# Altium PCB AT89S52继电器工控板.PCBDOC (part 1 of 2)
Units mm, origin at the board's own origin, x right, y up, seen from the top; angles counter-clockwise.
Board outline 172.85 x 146.43 mm, 2 copper layers (Top Layer, Bottom Layer); 86 components, 100 nets, 301 pads, 6 vias.
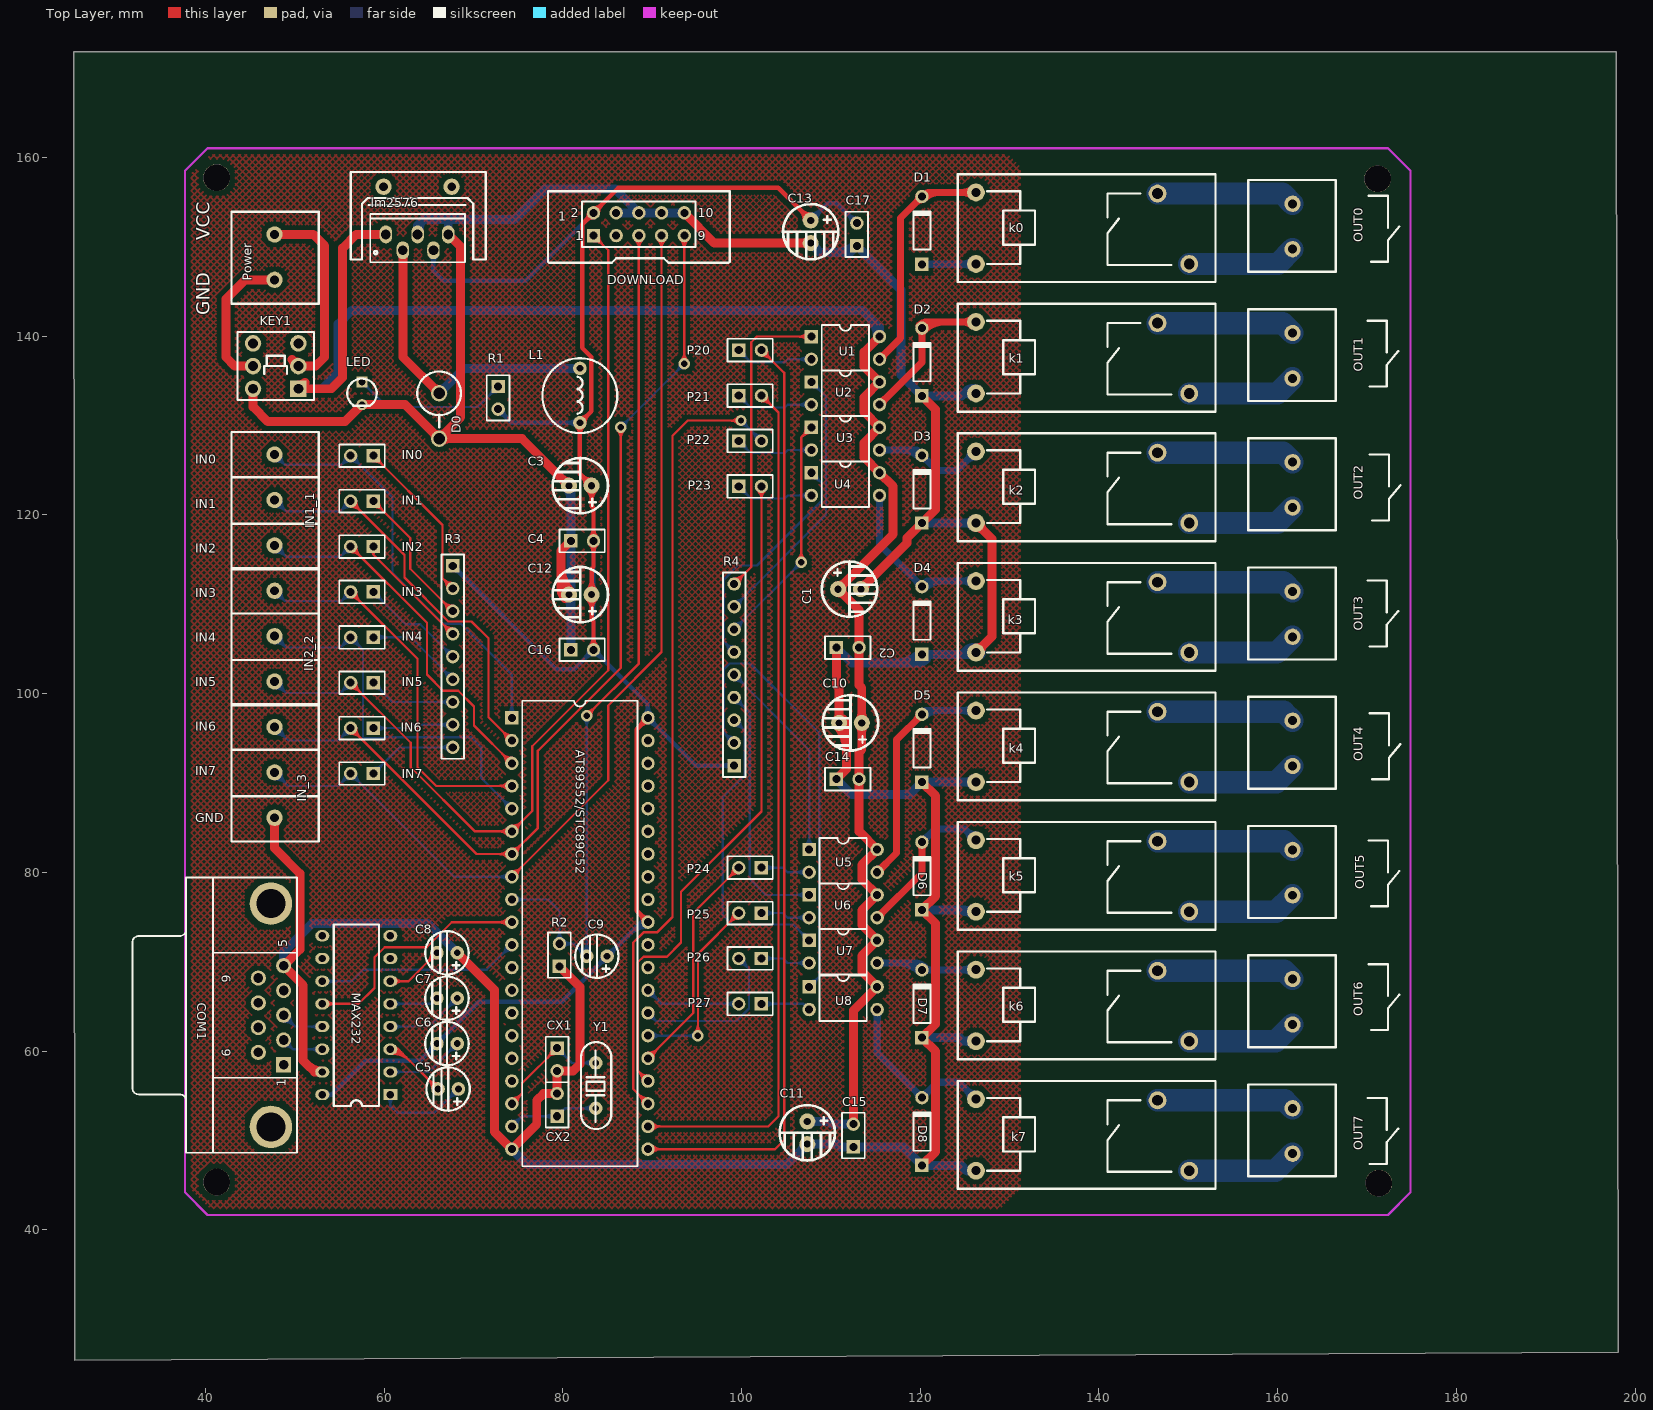
[diagram p0: Top Layer view]
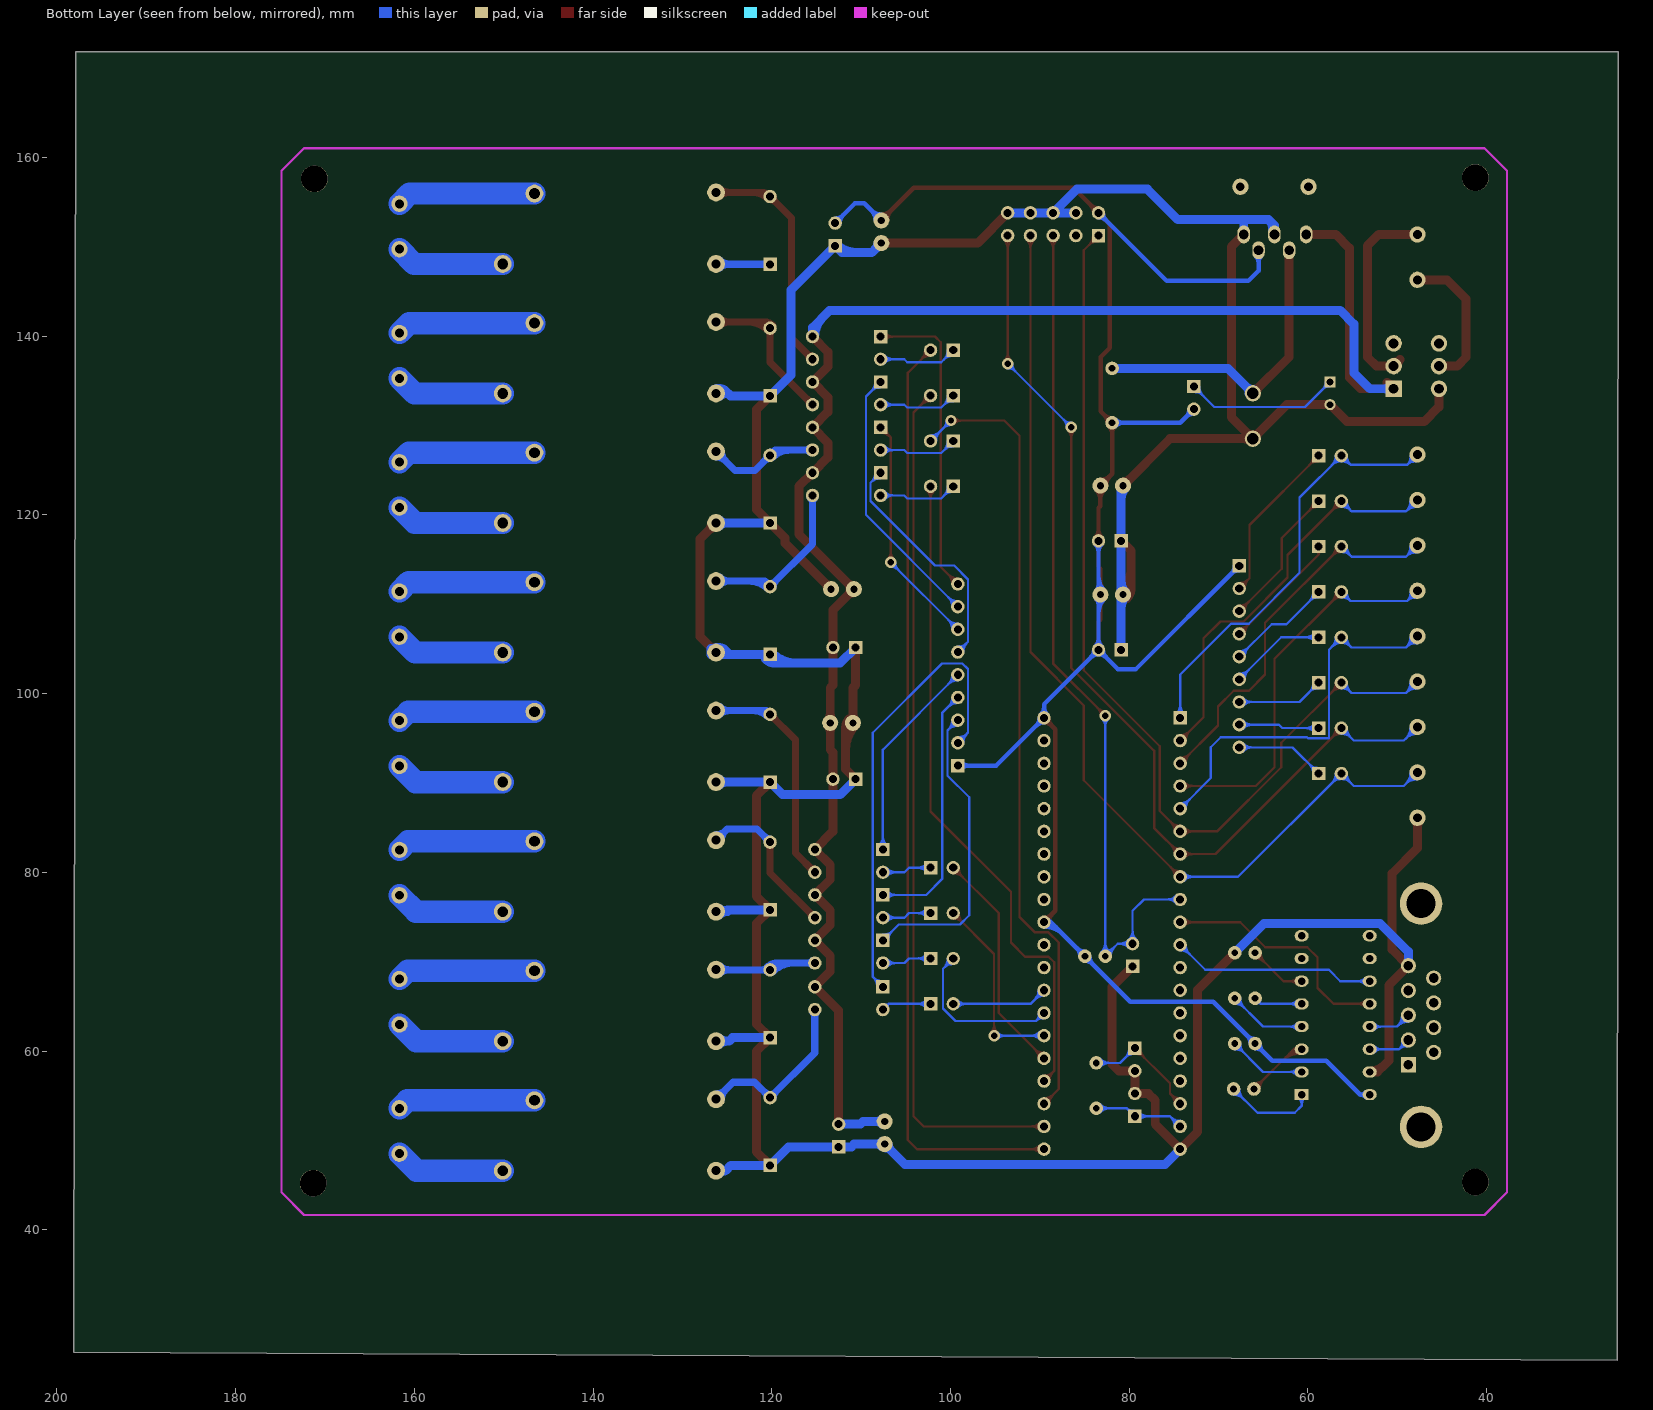
[diagram p1: Bottom Layer view, seen from below]

## Layer stack, top to bottom
Top Layer: signal copper 0.0356
Dielectric: dielectric 0.32, FR-4, Dk 4.8
Bottom Layer: signal copper 0.0356

## Board outline
25.4,25.4 198.12,26.289 197.866,171.831 25.273,171.831

## Design rules (kind name [scope] priority, off if disabled: settings)
Clearance [All] p1: gap=0.5
ComponentClearance [All] p1: gap=0.254 collisioncheckmode=3 verticalgap=0.254
PolygonConnect [All] p1: connectstyle=Relief reliefconductorwidth=0.254 reliefentries=4 polygonreliefangle="90 Angle"
RoutingVias [All] p1: holewidth=0.711 width=1.27 viastyle="Through Hole" minholewidth=0.711 minwidth=1.27 maxholewidth=0.711 maxwidth=1.27
SolderMaskExpansion [All] p1: expansion=0.102
TestPointUsage [All] p1: valid=0 allowmultiple=FALSE
Testpoint [All] p1: side=15 testpointundercomponent=TRUE minsize=1.016 maxsize=2.54 preferedsize=1.524 minholesize=0 maxholesize=1.016 preferedholesize=0.813 testpointgrid=0.025 style=1023 order=0123456789
Width 0.8 [InNetClass('0.8mm')] p1: maxlimit=0.8 minlimit=0.8 preferedwidth=0.8
Width 0.5mm [InNetClass('0.5mm')] p2: maxlimit=0.5 minlimit=0.5 preferedwidth=0.5
Width 1mm [InNetClass('1mm')] p3: maxlimit=1 minlimit=1 preferedwidth=1
Width 2.5mm [InNetClass('2..5mm')] p4: maxlimit=2.5 minlimit=2.5 preferedwidth=2.5
Width [All] p5: maxlimit=0.254 minlimit=0.254 preferedwidth=0.254
17 further rules are at their usual default settings.

## Classes and differential pairs
net class 0.8mm: NetD0_1 NetD1_1 NetD1_2 NetD2_2 NetD3_2 NetD4_2 NetD5_2 NetD6_2 NetD7_2 NetD8_2
net class 0.5mm: +5V
net class 1mm: +12V GND NetD0_1 NetKEY1_1 NetKEY1_6
net class 2..5mm: Netk0_3 Netk0_4 Netk1_3 Netk1_4 Netk2_3 Netk2_4 Netk3_3 Netk3_4 Netk4_3 Netk4_4 Netk5_3 Netk5_4 Netk6_3 Netk6_4 Netk7_3 Netk7_4

## Components (designator, comment, footprint, x,y, rotation, side; value= is the part's Value field where it differs from the comment)
1 "Download" HDR-2x5 88.519,151.384 r0 top
AT89S52/STC89C52 "" DIP-40 81.915,73.152 r270 top
C1 "DJDR" C-DJ-6 113.411,111.76 r0 top
C2 "CPDR" CPDR 111.887,105.156 r0 top
C3 "DJDR" C-DJ-6 80.645,123.19 r180 top
C4 "CPDR" CPDR 82.169,117.094 r0 top
C5 "10uf" C-DJ-4 65.913,58.293 r180 top
C6 "10uf" C-DJ-4 65.786,63.373 r180 top
C7 "10uf" C-DJ-4 65.786,68.453 r180 top
C8 "10uf" C-DJ-4 65.786,73.533 r180 top
C9 "10uf" C-DJ-4 82.55,73.152 r180 top
C10 "DJDR" C-DJ-6 110.871,96.647 r180 top
C11 "DJDR" C-DJ-6 107.442,49.53 r270 top
C12 "DJDR" C-DJ-6 80.645,110.998 r180 top
C13 "DJDR" C-DJ-6 107.823,150.368 r270 top
C14 "CPDR" CPDR 111.887,90.424 r0 top
C15 "CPDR" CPDR 112.522,50.546 r90 top
C16 "CPDR" CPDR 82.169,104.902 r0 top
C17 "CPDR" CPDR 112.903,151.384 r90 top
COM1 "D Connector 9" DSUB1.385-2H9 37.846,64.008 r90 top
CX1 "30p" HDR1X2 79.375,60.325 r270 top
CX2 "30p" HDR1X2 79.375,52.705 r90 top
D0 "WY2JG" ZCDZL 68.707,131.064 r0 top
D1 "ZL2JG" D-ZL-10 120.142,155.575 r90 top
D2 "ZL2JG" D-ZL-10 120.142,140.843 r90 top
D3 "ZL2JG" D-ZL-10 120.142,126.619 r90 top
D4 "ZL2JG" D-ZL-10 120.142,111.923 r90 top
D5 "ZL2JG" D-ZL-10 120.142,97.627 r90 top
D6 "ZL2JG" D-ZL-10 120.142,83.33 r90 top
D7 "ZL2JG" D-ZL-10 120.142,69.034 r90 top
D8 "ZL2JG" D-ZL-10 120.142,54.737 r90 top
IN0 "LED" HDR1X2 58.801,126.619 r180 top
IN1 "LED" HDR1X2 58.801,121.539 r180 top
IN1_1 "PZ_3" JK128_3 49.657,121.793 r0 top
IN2 "LED" HDR1X2 58.801,116.459 r180 top
IN2_2 "PZ_3" JK128_3 49.657,106.553 r0 top
IN3 "LED" HDR1X2 58.801,111.379 r180 top
IN4 "LED" HDR1X2 58.801,106.299 r180 top
IN5 "LED" HDR1X2 58.801,101.219 r180 top
IN6 "LED" HDR1X2 58.801,96.139 r180 top
IN7 "LED" HDR1X2 58.801,91.059 r180 top
IN_3 "" JK128_3 49.657,91.313 r0 top
k0 "JDQ1K" JDQ1KI 129.413,145.542 r0 top
k1 "JDQ1K" JDQ1KI 129.413,131.046 r0 top
k2 "JDQ1K" JDQ1KI 129.413,116.55 r0 top
k3 "JDQ1K" JDQ1KI 129.413,102.054 r0 top
k4 "JDQ1K" JDQ1KI 129.413,87.557 r0 top
k5 "JDQ1K" JDQ1KI 129.413,73.061 r0 top
k6 "JDQ1K" JDQ1KI 129.413,58.565 r0 top
k7 "JDQ1K" JDQ1KI 129.413,44.069 r0 top
KEY1 "SW-DPST" DPDT-6 47.879,136.652 r180 top
L1 "DG" L_DG 83.693,130.302 r270 top
LED "LED" LED_D 59.055,133.096 r270 top
lm2576 "LM2576T5.0" LM2576 63.754,150.876 r0 top
MAX232 "MAX232" DIP16 60.706,55.118 r180 top
OUT0 "PZ_2" DYDZ 160.528,150.241 r180 top
OUT1 "PZ_2" DYDZ 160.528,135.781 r180 top
OUT2 "PZ_2" DYDZ 160.528,121.321 r180 top
OUT3 "PZ_2" DYDZ 160.528,106.861 r180 top
OUT4 "PZ_2" DYDZ 160.528,92.402 r180 top
OUT5 "PZ_2" DYDZ 160.528,77.942 r180 top
OUT6 "PZ_2" DYDZ 160.528,63.482 r180 top
OUT7 "PZ_2" DYDZ 160.528,49.022 r180 top
P20 "" CPDR 100.965,138.43 r0 top
P21 "" CPDR 100.965,133.35 r0 top
P22 "" CPDR 100.965,128.27 r0 top
P23 "" CPDR 100.965,123.19 r0 top
P24 "" CPDR 100.965,80.518 r180 top
P25 "" CPDR 100.965,75.438 r180 top
P26 "" CPDR 100.965,70.358 r180 top
P27 "" CPDR 100.965,65.278 r180 top
Power "PZ_2" JK128_2 48.895,150.876 r0 top
R1 "Res" CPDR 72.771,133.096 r270 top
R2 "10k" CPDR 79.629,70.739 r90 top
R3 "" HDR-9 67.691,99.06 r270 top
R4 "" HDR-9 99.187,107.188 r90 top
U1 "GO" DIP-4 111.633,138.684 r270 top
U2 "GO" DIP-4 111.633,133.604 r270 top
U3 "GO" DIP-4 111.633,128.524 r270 top
U4 "GO" DIP-4 111.633,123.444 r270 top
U5 "GO" DIP-4 111.379,81.28 r270 top
U6 "GO" DIP-4 111.379,76.2 r270 top
U7 "GO" DIP-4 111.379,71.12 r270 top
U8 "GO" DIP-4 111.379,65.913 r270 top
Y1 "Y1" JZ_ZC 83.693,58.674 r90 top
? "Comment" SRP 63.754,152.908 r0 top

## Footprints (in the part's own frame and the unit in brackets; to place one, negate y for a bottom-side part, rotate by r counter-clockwise, add the part's x,y. Pads: shape width x height; smd on the part's side, far side on the other; paste and mask are expansions set on the pad)
C-DJ-4 [mil] "电容4mm"
  round 60 hole 30: 1(-95,100) 2(-5,100)
  silkscreen extent -145,5 46,195
C-DJ-6 [mm] "电容6mm"
  round 1.8 hole 0.8: 1(-2.591,-0.076) 2(-0.051,-0.076)
  silkscreen extent -4.42,-3.18 1.78,3.02
CPDR [mm] "瓷片电容"
  rect 1.5x1.5 hole 0.9: 1(-1.27,0)
  round 1.5 hole 0.9: 2(1.27,0)
  silkscreen extent -2.54,-1.27 2.54,1.27
D-ZL-10 [mm] "整流二极管"
  rect 1.5x1.5 hole 0.9: 1(-7.532,-0.051)
  round 1.5 hole 0.9: 2(0.048,-0.051)
  silkscreen extent -5.89,-1 -1.5,0.9
DIP16 [mil] "直插16管脚"
  rect 62x49.21 hole 32: 1(-0.15,-0.04)
  oval 62x49.21 hole 32: 2(-0.15,-100.04) 3(-0.15,-200.04) 4(-0.15,-300.04) 5(-0.15,-400.04) 6(-0.15,-500.04) 7(-0.15,-600.04) 8(-0.15,-700.04) 9(299.85,-700.04) 10(299.85,-600.04) 11(299.85,-500.04) 12(299.85,-400.04) 13(299.85,-300.04) 14(299.85,-200.04) 15(299.85,-100.04) 16(299.85,-0.04)
  silkscreen extent 50,-750 250,50
DIP-4 [mm] "直插4管脚"
  rect 1.5x1.5 hole 0.9: 1(-1.27,-3.81)
  round 1.5 hole 0.9: 2(1.27,-3.81) 3(1.27,3.81) 4(-1.27,3.81)
  silkscreen extent -2.55,-2.65 2.55,2.65
DIP-40 [mm] "直插40管脚"
  rect 1.5x1.5 hole 0.9: 1(-24.13,-7.62)
  round 1.5 hole 0.9: 2(-21.59,-7.62) 3(-19.05,-7.62) 4(-16.51,-7.62) 5(-13.97,-7.62) 6(-11.43,-7.62) 7(-8.89,-7.62) 8(-6.35,-7.62) 9(-3.81,-7.62) 10(-1.27,-7.62) 11(1.27,-7.62) 12(3.81,-7.62) 13(6.35,-7.62) 14(8.89,-7.62) 15(11.43,-7.62) 16(13.97,-7.62) 17(16.51,-7.62) 18(19.05,-7.62) 19(21.59,-7.62) 20(24.13,-7.62) 21(24.13,7.62) 22(21.59,7.62) 23(19.05,7.62) 24(16.51,7.62) 25(13.97,7.62) 26(11.43,7.62) 27(8.89,7.62) 28(6.35,7.62) 29(3.81,7.62) 30(1.27,7.62) 31(-1.27,7.62) 32(-3.81,7.62) 33(-6.35,7.62) 34(-8.89,7.62) 35(-11.43,7.62) 36(-13.97,7.62) 37(-16.51,7.62) 38(-19.05,7.62) 39(-21.59,7.62) 40(-24.13,7.62)
  silkscreen extent -26.05,-6.45 26.05,6.45
DPDT-6 [mm] "开关按键"
  round 1.85 hole 1.1: 1(-2.54,0) 3(-2.54,-2.54) 4(2.54,-2.54) 5(2.54,0) 6(2.54,2.54)
  rect 1.85x1.85 hole 1.1: 2(-2.54,2.54)
  silkscreen extent -4.28,-3.81 4.28,3.81
DSUB1.385-2H9 [mm] "Connector; D Subminiature; 9 Position; Right Angle; Pitch 1.385 mm"
  rect 1.69x1.69 hole 1.09: 1(-5.54,-10.92)
  round 1.69 hole 1.09: 2(-2.77,-10.92) 3(0,-10.92) 4(2.77,-10.92) 5(5.54,-10.92) 6(-4.155,-8.08) 7(-1.385,-8.08) 8(1.385,-8.08) 9(4.155,-8.08)
  round 4.76 hole 3.26: 10(-12.495,-9.5) 11(12.495,-9.5)
  silkscreen extent -15.4,-12.4 15.4,6
DYDZ [mil] "接线端子"
  round 71.81 hole 39.37: 1(-45,20) 2(-45,-180)
  silkscreen extent -235,-285 150,120
HDR1X2 [mm] "Connector; Header; 2 Position"
  rect 1.5x1.5 hole 0.9: 1(0,0)
  round 1.5 hole 0.9: 2(2.54,0)
  silkscreen extent -1.27,-1.27 3.81,1.27
HDR-2x5 [mm] "下载口"
  rect 1.5x1.5 hole 0.9: 1(-5.08,-0.127)
  round 1.5 hole 0.9: 2(-5.08,2.413) 3(-2.54,-0.127) 4(-2.54,2.413) 5(0,-0.127) 6(0,2.413) 7(2.54,-0.127) 8(2.54,2.413) 9(5.08,-0.127) 10(5.08,2.413)
  silkscreen extent -10.16,-3.17 10.16,4.83
HDR-9 [mm] "9排针"
  rect 1.5x1.5 hole 0.9: 1(-15.24,0)
  round 1.5 hole 0.9: 2(-12.7,0) 3(-10.16,0) 4(-7.62,0) 5(-5.08,0) 6(-2.54,0) 7(0,0) 8(2.54,0) 9(5.08,0)
  silkscreen extent -16.51,-1.27 6.35,1.27
JDQ1KI [mm] "继电器一常开"
  round 2 hole 1: 1(-3.175,10.541) 2(-3.175,2.54)
  round 2 hole 1.2: 3(20.701,2.54) 4(17.145,10.414)
  silkscreen extent -5.21,0.51 23.62,12.57
JK128_2 [mil] "接线端子"
  round 71.81 hole 39.37: 1(-45,20) 2(-45,-180)
  silkscreen extent -235,-285 150,120
JK128_3 [mm] "接线端子_3"
  round 1.824 hole 1: 1(-1.905,4.953) 2(-1.905,-0.127) 3(-1.905,-5.207)
  silkscreen extent -6.73,-7.87 3.05,7.49
JZ_ZC [mil] "晶振"
  round 60 hole 30: 1(-200,0) 2(0,0)
  silkscreen extent -292,-68 92,65
L_DG [mil] "100mH 电感"
  round 60 hole 30: 1(-240,-70) 2(0,-70)
  silkscreen extent -285,-235 45,95
LED_D [mm] "发光二极管_3mm"
  rect 1.25x1.25 hole 0.75: 1(-1.778,-1.524)
  round 1.25 hole 0.75: 2(0.762,-1.524)
  silkscreen extent -2.16,-3.17 0.89,0.13
LM2576 [mm] "LM2576"
  oval 1.4x2 hole 1.1: 1(-3.556,0.508) 2(-1.651,-1.27) 3(0,0.508) 4(1.778,-1.27) 5(3.429,0.508)
  silkscreen extent -5.3,-2.61 5.3,2.8
SRP [mm] "散热片78XX"
  round 1.824 hole 0.962: 0(-3.81,3.81) 0(3.81,3.81)
  silkscreen extent -7.49,-4.32 7.62,5.46
ZCDZL [mm] "直插电阻立式插"
  round 1.824 hole 1.262: 1(-2.54,2.54) 2(-2.54,-2.54)
  silkscreen extent -4.98,-1.27 -0.1,4.98

## Part data
1: library part "Header 5X2", "Header, 5-Pin, Dual row"
AT89S52/STC89C52: library part AT89S52-P, "8 位微处理器/40引脚"
C1 C3 C10 C11 C12 C13: "电解电容"
C2 C4 C14 C15 C16 C17: "瓷片电容"
C5 C6 C7 C8 C9: library part "CAPACITOR POL", "Capacitor"
COM1: "Receptacle Assembly, 9 Position, Right Angle"
CX1 CX2: library part CAP, "Capacitor"
D0: "稳压二级管"
D1 D2 D3 D4 D5 D6 D7 D8: "整流二极管"
IN1_1 IN2_2: "排针——3"
IN_3: library part PZ_3, "排针——3"
k0 k1 k2 k3 k4 k5 k6 k7: "继电器一常开"
KEY1: "Double-Pole, Single-Throw Switch"
L1: "电感"
LED: "发光二极管"
lm2576: library part LM2576HVT-3.3, "Simple Switcher 3A Step Down Voltage Regulator"
OUT0 OUT1 OUT2 OUT3 OUT4 OUT5 OUT6 OUT7 Power: "排针——2"
P20 P21 P22 P23 P24 P25 P26 P27: library part LED, "发光二极管"
R1: "电阻"
R2: library part RES2
R3 R4: library part "Res PZ_8", "8位排阻"
U1 U2 U3 U4 U5 U6 U7 U8: "光耦"
Y1: library part CRYSTAL, "Crystal"

## Free pads (board coordinates)
  round 3 hole 3: 0(41.275,45.339) 1(41.275,157.734) 2(171.196,157.607) 3(171.323,45.212)

## Via types
v1: diameter 1.27, hole 0.711, Top Layer to Bottom Layer, 6 vias

## Nets (pads, with @x,y where several pads share a name; then routed paths per layer and width w, separated by ;. In a path a pad name is that pad's centre, name@x,y a point inside that pad or via, vN(x,y) a via of type N, cw(c..) or ccw(c..) an arc to the next point about the centre after c; other vN are vias at no path point)
+5V: 1.2 AT89S52/STC89C52.31 AT89S52/STC89C52.40 C3.1 C4.2 C6.2 C9.1 C12.1 C13.1 C16.2 C17.2 L1.2 lm2576.4 MAX232.16 R1.2 R3.1 R4.1 | length 319.5
  Top Layer w0.5: L1.2@81.553,129.94 cw(c80.679,129.066) 81.915,129.066 cw(c83.151,129.066) L1.2@82.277,129.94 ; L1.2@81.915,130.814 ccw(c81.915,132.05) 82.789,131.176 ccw(c83.663,130.302) L1.2@82.427,130.302 ; C3.1@82.586,123.266 ccw(c81.017,123.266) 82.126,124.376 ccw(c83.236,125.485) C3.1@83.236,123.916 ; C12.1@82.776,110.615 cw(c81.667,109.505) 83.236,109.505 cw(c84.805,109.505) C12.1@83.695,110.615 ; C12.1@82.776,111.534 ccw(c81.667,112.643) 83.236,112.643 ccw(c84.805,112.643) C12.1@83.695,111.534 ; C3.1@82.776,122.807 cw(c81.667,121.697) 83.236,121.697 cw(c84.805,121.697) C3.1@83.695,122.807 ; 1.2@82.939,153.797 cw(c81.732,153.797) 82.585,152.943 cw(c83.439,152.09) 1.2@83.439,153.297 ; C16.2@83.085,105.256 ccw(c82.232,106.109) 83.439,106.109 ccw(c84.646,106.109) C16.2@83.793,105.256 ; C4.2@83.085,116.74 cw(c82.232,115.887) 83.439,115.887 cw(c84.646,115.887) C4.2@83.793,116.74 ; C4.2@83.085,117.448 ccw(c82.232,118.301) 83.439,118.301 ccw(c84.646,118.301) C4.2@83.793,117.448 ; C16.2@83.439,104.902 83.439,108.077 83.236,108.28 C12.1@83.236,111.074 83.236,113.97 83.439,114.173 C4.2@83.439,117.094 83.439,120.777 83.236,120.98 C3.1@83.236,123.266 81.915,124.587 L1.2@81.915,130.302 83.185,131.572 83.185,137.668 82.169,138.684 82.169,152.527 1.2@83.439,153.797 86.233,156.591 104.115,156.591 C13.1@107.747,152.959 ; 1.2@83.439,154.297 ccw(c83.439,155.504) 84.293,154.651 ccw(c85.146,153.797) 1.2@83.939,153.797 ; AT89S52/STC89C52.31@89.035,74.422 ccw(c87.828,74.422) 88.681,75.276 ccw(c89.535,76.129) AT89S52/STC89C52.31@89.535,74.922 ; AT89S52/STC89C52.40@89.035,97.282 cw(c87.828,97.282) 88.681,96.428 cw(c89.535,95.575) AT89S52/STC89C52.40@89.535,96.782 ; AT89S52/STC89C52.31@89.535,74.422 88.265,75.692 88.265,96.012 AT89S52/STC89C52.40@89.535,97.282 ; C13.1@107.097,152.959 ccw(c105.528,152.959) 106.637,154.068 ccw(c107.747,155.178) C13.1@107.747,153.609
  Bottom Layer w0.5: MAX232.16@53.09,55.119 54.153,55.119 ; MAX232.16@53.518,54.855 cw(c54.153,54.225) 54.153,55.119 ; MAX232.16@53.518,55.383 ccw(c54.153,56.013) 54.153,55.119 ; lm2576.4@65.214,148.988 cw(c64.446,148.22) 65.532,148.22 cw(c66.618,148.22) lm2576.4@65.85,148.988 ; C6.2@65.401,60.833 cw(c64.165,60.833) 65.039,59.959 cw(c65.913,59.085) C6.2@65.913,60.321 ; lm2576.4@65.532,149.606 65.532,147.32 66.675,146.177 75.819,146.177 1.2@83.439,153.797 ; C6.2@65.913,61.345 ccw(c65.913,62.581) 66.787,61.707 ccw(c67.661,60.833) C6.2@66.425,60.833 ; R3.1@67.691,113.8 cw(c67.691,112.593) 68.545,113.446 cw(c69.398,114.3) R3.1@68.191,114.3 ; R3.1@67.691,114.3 79.248,102.743 81.28,102.743 C16.2@83.439,104.902 ; R1.2@72.771,131.326 cw(c72.771,130.119) 73.625,130.972 cw(c74.478,131.826) R1.2@73.271,131.826 ; R1.2@72.771,131.826 74.295,130.302 L1.2@81.915,130.302 ; L1.2@81.553,129.94 ccw(c80.679,129.066) 80.679,130.302 ccw(c80.679,131.538) L1.2@81.553,130.664 ; C12.1@82.776,110.615 cw(c81.176,109.014) 83.439,109.014 ; C12.1@82.776,111.534 ccw(c81.176,113.134) 83.439,113.134 ; C16.2@82.939,104.902 cw(c81.732,104.902) 82.585,104.048 cw(c83.439,103.195) 83.439,104.402 cw(c83.439,103.195) 84.293,104.048 cw(c85.146,104.902) C16.2@83.939,104.902 ; 1.2@82.939,153.797 cw(c81.732,153.797) 82.585,152.943 cw(c83.439,152.09) 1.2@83.439,153.297 ; C16.2@83.085,105.256 ccw(c82.232,106.109) 83.439,106.109 ccw(c84.646,106.109) C16.2@83.793,105.256 ; C4.2@83.085,116.74 cw(c82.232,115.887) 83.439,115.887 cw(c84.646,115.887) C4.2@83.793,116.74 ; 83.439,109.996 cw(c84.314,109.996) C12.1@83.695,110.615 ; 83.439,112.153 ccw(c84.314,112.153) C12.1@83.695,111.534 ; C4.2@83.439,117.094 83.439,111.074 C16.2@83.439,104.902 ; C9.1@84.451,70.612 cw(c83.215,70.612) 84.089,69.738 cw(c84.963,68.864) C9.1@84.963,70.1 ; C9.1@84.963,71.124 ccw(c84.963,72.36) 85.837,71.486 ccw(c86.711,70.612) C9.1@85.475,70.612 ; 87.381,73.03 cw(c89.535,70.875) AT89S52/STC89C52.31@89.535,73.922 ; 88.234,73.883 cw(c89.535,72.582) AT89S52/STC89C52.31@89.535,74.422 ; 88.392,74.041 cw(c88.801,73.632) AT89S52/STC89C52.31@89.195,74.056 ; 88.759,74.408 cw(c89.154,74.012) AT89S52/STC89C52.31@89.535,74.422 ; AT89S52/STC89C52.31@89.076,74.223 ccw(c88.773,74.091) 88.773,74.422 ; AT89S52/STC89C52.31@89.076,74.621 cw(c88.773,74.753) 88.773,74.422 ; AT89S52/STC89C52.40@89.181,97.636 ccw(c88.328,98.489) 89.535,98.489 ccw(c90.742,98.489) AT89S52/STC89C52.40@89.889,97.636 ; AT89S52/STC89C52.40@89.535,96.782 cw(c89.535,95.575) 90.389,96.428 cw(c91.242,97.282) AT89S52/STC89C52.40@90.035,97.282 ; R4.1@98.833,91.594 ccw(c97.98,90.741) 97.98,91.948 ccw(c97.98,93.155) R4.1@98.833,92.302 ; R4.1@99.187,91.948 94.869,91.948 AT89S52/STC89C52.40@89.535,97.282 89.535,98.806 C16.2@83.439,104.902 ; C13.1@107.747,152.959 109.652,154.864 110.693,154.864 C17.2@112.903,152.654 ; C13.1@107.747,153.609 ccw(c107.747,155.178) 108.856,154.068 ccw(c109.966,152.959) C13.1@108.397,152.959 ; C17.2@112.403,152.654 ccw(c111.196,152.654) 112.049,153.508 ccw(c112.903,154.361) C17.2@112.903,153.154 ; 54.153,55.119 57.962,58.928 64.008,58.928 C6.2@65.913,60.833 70.612,65.532 79.883,65.532 C9.1@84.963,70.612 88.773,74.422 ; 88.773,74.422 AT89S52/STC89C52.31@89.535,74.422
+12V: C1.1 C2.2 C10.1 C11.1 C14.2 C15.2 KEY1.2 lm2576.1 U1.4 U2.4 U3.4 U4.4 U5.4 U6.4 U7.4 U8.4 | length 220.6
  Top Layer w1: KEY1.2@50.419,134.112 54.102,134.112 55.372,135.382 55.372,149.86 56.896,151.384 lm2576.1@60.198,151.384 ; KEY1.2@50.419,134.537 ccw(c50.419,135.563) 51.145,134.838 ccw(c51.87,134.112) KEY1.2@50.844,134.112 ; C1.1@110.82,111.284 cw(c110.82,110.318) 111.503,111.001 cw(c112.186,111.684) 111.22,111.684 cw(c112.186,111.684) 111.503,112.367 cw(c110.82,113.049) C1.1@110.82,112.084 ; C15.2@112.522,51.816 112.522,64.516 U8.4@115.189,67.183 113.462,68.91 113.462,70.663 U7.4@115.189,72.39 113.462,74.117 113.462,75.743 U6.4@115.189,77.47 113.462,79.197 113.462,80.823 U5.4@115.189,82.55 113.157,84.582 C14.2@113.157,90.424 113.157,93.421 113.462,93.726 C10.1@113.462,96.723 113.462,100.635 113.157,100.94 C2.2@113.157,105.156 113.157,109.347 C1.1@110.82,111.684 116.967,117.831 116.967,123.19 U4.4@115.443,124.714 113.716,126.441 113.716,128.067 U3.4@115.443,129.794 113.716,131.521 113.716,133.147 U2.4@115.443,134.874 113.716,136.601 113.716,138.227 U1.4@115.443,139.954 ; C10.1@113.179,96.44 cw(c112.496,95.758) 113.462,95.758 cw(c114.427,95.758) C10.1@113.745,96.44 ; C10.1@113.179,97.006 ccw(c112.496,97.689) 113.462,97.689 ccw(c114.427,97.689) C10.1@113.745,97.006
  Bottom Layer w1: KEY1.2@50.419,134.112 53.086,134.112 54.864,135.89 54.864,141.351 56.388,142.875 113.538,142.875 115.443,140.97 U1.4@115.443,139.954 ; KEY1.2@50.72,133.811 cw(c51.445,133.086) 51.445,134.112 cw(c51.445,135.138) KEY1.2@50.72,134.413 ; C11.1@107.366,52.121 109.779,52.121 110.084,51.816 C15.2@112.522,51.816 ; C11.1@107.649,51.838 cw(c108.331,51.155) 108.331,52.121 cw(c108.331,53.086) C11.1@107.649,52.404 ; 114.298,142.115 cw(c112.137,139.954) U1.4@115.193,139.954
GND: 1.4 1.6 1.8 1.10 AT89S52/STC89C52.20 C1.2 C2.1 C3.2 C4.1 C8.1 C10.2 C11.2 C12.2 C13.2 C14.1 C15.1 C16.1 C17.1 COM1.5 CX1.2 CX2.2 D0.2 D2.1 D3.1 D4.1 D5.1 D6.1 D7.1 D8.1 IN_3.3 k1.2 k2.2 k3.2 k4.2 k5.2 k6.2 k7.2 KEY1.6 LED.2 lm2576.3 lm2576.5 MAX232.15 R2.1 | length 577.4
  Top Layer w1: KEY1.6@45.339,134.112 45.339,132.08 46.99,130.429 55.626,130.429 LED.2@57.531,132.334 62.357,132.334 D0.2@66.167,128.524 ; IN_3.3@47.461,85.815 cw(c46.757,85.111) 47.752,85.111 cw(c48.747,85.111) IN_3.3@48.043,85.815 ; IN_3.3@47.752,86.106 47.752,82.702 50.597,79.858 50.597,71.379 COM1.5@48.766,69.548 50.952,67.362 50.952,58.928 52.221,57.659 MAX232.15@53.09,57.659 ; 51.509,58.372 ccw(c52.927,59.79) MAX232.15@52.927,57.784 ; D0.2@65.755,128.524 ccw(c64.76,128.524) 65.464,129.227 ccw(c66.167,129.931) 66.167,128.936 ccw(c66.167,129.931) 66.87,129.227 ccw(c67.574,128.524) D0.2@66.579,128.524 ; D0.2@66.458,128.233 cw(c67.162,127.529) 67.162,128.524 cw(c67.162,129.519) D0.2@66.458,128.815 ; lm2576.5@67.183,151.384 68.58,149.987 68.58,130.937 D0.2@66.167,128.524 ; C8.1@68.199,70.993 72.339,66.853 72.339,50.978 AT89S52/STC89C52.20@74.295,49.022 77.089,51.816 77.089,54.483 77.851,55.245 CX2.2@79.375,55.245 CX1.2@79.375,57.785 81.153,57.785 81.915,58.547 81.915,67.183 R2.1@79.629,69.469 ; 79.781,114.247 ccw(c83.869,114.247) C12.2@80.979,111.357 ; C12.2@80.272,110.65 cw(c81.455,111.833) 79.781,111.833 79.781,111.589 80.296,111.074 ccw(c79.33,111.074) 80.013,111.757 ccw(c80.696,112.44) C12.2@80.696,111.474 ; C3.2@80.296,123.266 ccw(c79.33,123.266) 80.013,123.949 ccw(c80.696,124.632) C3.2@80.696,123.666 ; C12.2@80.696,111.074 79.781,111.989 79.781,115.976 C4.1@80.899,117.094 ; C3.2@80.696,123.266 75.438,128.524 D0.2@66.167,128.524 ; 1.10@93.599,153.797 96.977,150.419 C13.2@107.747,150.419 ; C13.2@107.464,150.136 ccw(c106.781,149.453) 106.781,150.419 ccw(c106.781,151.384) C13.2@107.464,150.702 ; C14.1@110.617,90.424 111.735,91.542 111.735,95.91 C10.2@110.922,96.723 110.922,100.635 110.617,100.94 C2.1@110.617,105.156 ; C10.2@110.639,96.44 cw(c107.994,93.795) 111.735,93.795 ; C10.2@110.639,97.006 ccw(c109.956,97.689) 110.922,97.689 ccw(c111.887,97.689) C10.2@111.205,97.006 ; C10.2@110.922,96.323 cw(c110.922,95.358) 111.605,96.04 cw(c112.287,96.723) C10.2@111.322,96.723 ; C10.2@111.346,97.147 cw(c110.408,96.209) 111.735,96.209 ; C1.2@113.36,111.684 118.542,116.865 118.542,117.436 D3.1@120.193,119.087 121.717,120.611 121.717,131.788 D2.1@120.193,133.311 ; C1.2@113.36,112.084 ccw(c113.36,113.049) 114.043,112.367 ccw(c114.726,111.684) C1.2@113.76,111.684 ; D8.1@120.193,47.205 121.717,48.729 121.717,59.978 D7.1@120.193,61.502 121.717,63.025 121.717,74.275 D6.1@120.193,75.798 121.717,77.322 121.717,88.571 D5.1@120.193,90.095 ; k3.2@126.238,104.594 128.016,106.372 128.016,117.312 k2.2@126.238,119.09 ; k3.2@126.238,105.094 ccw(c126.238,106.301) 127.092,105.447 ccw(c127.945,104.594) k3.2@126.738,104.594 ; k2.2@126.238,118.59 cw(c126.238,117.383) 127.092,118.236 cw(c127.945,119.09) k2.2@126.738,119.09
  Bottom Layer w1: COM1.5@48.766,69.548 48.766,71.118 51.943,74.295 64.897,74.295 C8.1@68.199,70.993 ; lm2576.3@63.754,151.384 63.754,152.4 64.389,153.035 ; lm2576.3@63.952,151.713 cw(c65.484,151.94) 64.389,153.035 ; lm2576.5@67.183,151.384 67.183,152.908 67.31,153.035 ; AT89S52/STC89C52.20@74.295,49.022 76.022,47.295 105.08,47.295 C11.2@107.366,49.581 110.795,49.581 111.1,49.276 C15.1@112.522,49.276 118.122,49.276 D8.1@120.193,47.205 124.575,47.205 125.171,46.609 ; C12.2@80.413,110.791 cw(c79.24,109.618) 80.899,109.618 ; C12.2@80.413,111.357 ccw(c79.24,112.53) 80.899,112.53 ; C3.2@80.413,122.983 cw(c79.24,121.81) 80.899,121.81 ; C3.2@80.696,123.266 80.899,123.063 C4.1@80.899,117.094 80.899,111.074 C16.1@80.899,104.902 ; 1.4@85.979,153.797 1.6@88.519,153.797 ; 1.10@93.599,153.797 1.8@91.059,153.797 1.6@88.519,153.797 ; C11.2@106.966,49.581 cw(c106,49.581) 106.683,48.898 cw(c107.366,48.215) C11.2@107.366,49.181 ; C11.2@107.649,49.298 cw(c108.331,48.615) 108.331,49.581 cw(c108.331,50.546) C11.2@107.649,49.864 ; C13.2@107.747,150.019 cw(c107.747,149.053) 108.43,149.736 cw(c109.112,150.419) C13.2@108.147,150.419 ; C13.2@107.747,150.419 108.814,149.352 112.141,149.352 C17.1@112.903,150.114 117.831,145.186 117.831,135.674 D2.1@120.193,133.311 124.622,133.311 124.897,133.586 k1.2@125.982,133.586 ; 110.46,149.352 ccw(c110.46,152.557) C17.1@112.726,150.291 ; C14.1@110.617,90.424 112.344,88.697 118.795,88.697 D5.1@120.193,90.095 125.166,90.095 ; C2.1@110.617,105.156 112.344,103.429 119.231,103.429 ; 117.266,103.429 ccw(c117.266,107.319) D4.1@120.017,104.568 ; D7.1@120.193,61.502 124.378,61.502 124.775,61.105 k6.2@126.238,61.105 ; D6.1@120.193,75.798 124.777,75.798 ; D3.1@120.193,119.087 125.166,119.087 ; D4.1@120.724,103.861 cw(c119.68,104.905) 119.68,103.429 119.231,103.429 ; 124.543,104.391 ccw(c124.543,106.289) 125.884,104.947 cw(c125.031,105.801) 125.031,104.594 cw(c125.031,103.386) k3.2@125.884,104.24 ; 124.555,75.798 cw(c124.555,73.918) 125.884,75.248 ccw(c125.031,74.394) 125.031,75.601 ccw(c125.031,76.808) k5.2@125.884,75.955 ; 125.025,90.095 ccw(c125.025,91.311) k4.2@125.884,90.451 ; 125.025,119.087 ccw(c125.025,120.303) k2.2@125.884,119.443 ; 125.037,90.095 cw(c125.037,88.896) k4.2@125.884,89.744 ; 125.037,119.087 cw(c125.037,117.889) k2.2@125.884,118.736 ; 125.067,133.756 cw(c125.974,132.849) 126.407,134.056 126.456,134.056 126.492,134.02 126.416,134.02 126.11,133.714 k1.2@125.982,133.586 ; 125.152,133.841 cw(c125.936,133.057) k1.2@126.486,134.02 ; 125.185,104.81 cw(c125.991,104.005) 126.432,105.055 126.441,105.055 126.463,105.054 k3.2@126.494,105.023 ; 125.243,104.867 cw(c125.968,104.142) k3.2@126.494,105.023 ; k5.2@125.849,75.287 ccw(c124.777,74.419) 124.777,75.798 ; k3.2@125.849,104.908 cw(c124.767,105.783) 124.767,104.391 ; k7.2@125.854,46.289 ccw(c125.171,45.721) 125.171,46.609 ; k7.2@125.854,46.929 cw(c125.171,47.497) 125.171,46.609 ; k4.2@125.854,90.417 cw(c125.166,90.989) 125.166,90.095 ; k2.2@125.854,119.409 cw(c125.166,119.981) 125.166,119.087 ; k4.2@125.854,89.777 ccw(c125.169,89.204) 125.169,90.097 ; k4.2@125.854,90.418 cw(c125.169,90.991) 125.169,90.097 ; k2.2@125.854,118.769 ccw(c125.169,118.196) 125.169,119.09 ; k2.2@125.854,119.41 cw(c125.169,119.983) 125.169,119.09 ; k4.2@125.856,89.775 ccw(c125.166,89.192) 125.166,90.095 ; k2.2@125.856,118.767 ccw(c125.166,118.184) 125.166,119.087 ; k6.2@125.884,60.752 ccw(c125.031,59.898) 125.031,61.105 ccw(c125.031,62.312) k6.2@125.884,61.459 ; k1.2@125.884,133.232 ccw(c125.031,132.379) 125.031,133.586 ccw(c125.031,134.793) k1.2@125.884,133.939 ; k7.2@126.238,46.609 125.171,46.609 ; k5.2@126.238,75.601 124.974,75.601 124.777,75.798 ; k4.2@126.238,90.097 125.169,90.097 ; k3.2@126.238,104.594 124.969,104.594 124.767,104.391 ; k2.2@126.238,119.09 125.169,119.09 ; k1.2@126.238,133.586 k1.2@125.982,133.586 ; 64.389,153.035 67.31,153.035 ; 67.31,153.035 74.549,153.035 77.978,156.464 85.852,156.464 1.6@88.519,153.797 ; 119.231,103.429 D4.1@120.193,104.391 124.767,104.391 ; 124.767,104.391 126.238,104.391 126.797,104.391 126.797,104.594 126.797,105.023 k3.2@126.494,105.023 ; 125.166,90.095 125.169,90.097 ; 125.166,119.087 125.169,119.09
NetC5_1: C5.1 MAX232.1 | length 16.1
  Bottom Layer w0.254: MAX232.1@60.358,54.767 cw(c59.508,53.917) 60.71,53.917 cw(c61.912,53.917) MAX232.1@61.062,54.767 ; MAX232.1@60.71,55.119 60.71,53.844 61.468,53.086 65.659,53.086 C5.1@68.326,55.753 ; C5.1@67.691,55.753 cw(c66.158,55.753) 67.242,54.669 cw(c68.326,53.585) C5.1@68.326,55.118 ; C5.1@67.945,55.753 cw(c67.025,55.753) 67.676,55.103 cw(c68.326,54.452) C5.1@68.326,55.372
NetC5_2: C5.2 MAX232.3 | length 20.5
  Top Layer w0.254: MAX232.3@60.71,60.199 61.594,60.199 ; MAX232.3@60.865,60.206 cw(c61.226,59.837) 61.591,60.202 ; MAX232.3@60.872,59.701 cw(c60.872,56.756) 62.955,58.838 ; MAX232.3@60.872,59.955 cw(c60.872,57.623) 62.521,59.272 ; MAX232.3@60.872,60.209 cw(c60.872,58.491) 62.087,59.706 ; MAX232.3@60.872,60.463 cw(c60.872,59.358) 61.654,60.139 ; MAX232.3@61.043,60.024 cw(c61.406,59.652) 61.773,60.02 ; MAX232.3@61.22,59.843 cw(c61.585,59.468) 61.955,59.838 ; MAX232.3@61.338,60.022 cw(c61.594,59.925) 61.594,60.199 ; MAX232.3@61.338,60.376 ccw(c61.594,60.473) 61.594,60.199 ; C5.2@65.405,55.753 ccw(c63.872,55.753) 64.956,56.837 ccw(c66.04,57.921) C5.2@66.04,56.388 ; C5.2@65.659,55.753 ccw(c64.739,55.753) 65.39,56.403 ccw(c66.04,57.054) C5.2@66.04,56.134 ; C5.2@66.04,55.753 61.594,60.199
NetC6_1: C6.1 MAX232.2 | length 14.5
  Bottom Layer w0.254: MAX232.2@60.71,57.659 65.025,57.659 C6.1@68.199,60.833 ; MAX232.2@61.224,57.307 cw(c62.074,56.457) 62.074,57.659 cw(c62.074,58.861) MAX232.2@61.224,58.011 ; C6.1@67.564,60.833 cw(c66.031,60.833) 67.115,59.749 cw(c68.199,58.665) C6.1@68.199,60.198 ; C6.1@67.818,60.833 cw(c66.898,60.833) 67.549,60.183 cw(c68.199,59.532) C6.1@68.199,60.452
NetC7_1: C7.1 MAX232.4 | length 14.5
  Bottom Layer w0.254: MAX232.4@60.71,62.739 65.025,62.739 C7.1@68.199,65.913 ; MAX232.4@61.224,62.387 cw(c62.074,61.537) 62.074,62.739 cw(c62.074,63.941) MAX232.4@61.224,63.091 ; C7.1@67.564,65.913 cw(c66.031,65.913) 67.115,64.829 cw(c68.199,63.745) C7.1@68.199,65.278 ; C7.1@67.818,65.913 cw(c66.898,65.913) 67.549,65.263 cw(c68.199,64.612) C7.1@68.199,65.532
NetC7_2: C7.2 MAX232.5 | length 8.1
  Bottom Layer w0.254: MAX232.5@60.71,65.279 65.279,65.279 ; MAX232.5@61.224,64.927 cw(c62.074,64.077) 62.074,65.279 cw(c62.074,66.481) MAX232.5@61.224,65.631 ; C7.2@65.34,65.638 cw(c65.056,65.502) 65.279,65.279 ; C7.2@65.638,65.34 ccw(c65.502,65.056) 65.279,65.279 ; C7.2@65.913,65.913 65.279,65.279
NetC8_2: C8.2 MAX232.6 | length 12.3
  Top Layer w0.254: MAX232.6@60.71,67.819 62.739,67.819 C8.2@65.913,70.993 ; MAX232.6@61.224,67.467 cw(c62.074,66.617) 62.074,67.819 cw(c62.074,69.021) MAX232.6@61.224,68.171 ; C8.2@65.278,70.993 cw(c63.745,70.993) 64.829,69.909 cw(c65.913,68.825) C8.2@65.913,70.358 ; C8.2@65.532,70.993 cw(c64.612,70.993) 65.263,70.343 cw(c65.913,69.692) C8.2@65.913,70.612
NetCOM1_2: COM1.2 MAX232.14 | length 10.1
  Bottom Layer w0.254: COM1.2@48.766,61.238 49.805,60.199 MAX232.14@53.09,60.199 ; COM1.2@48.823,60.778 cw(c48.915,60.044) 49.437,60.567 cw(c49.96,61.089) COM1.2@49.226,61.181 ; COM1.2@48.855,60.525 cw(c48.996,59.39) 49.805,60.199 cw(c50.614,61.008) COM1.2@49.479,61.149 ; MAX232.14@52.575,59.847 ccw(c51.725,58.997) 51.725,60.199 ccw(c51.725,61.401) MAX232.14@52.575,60.551
NetCOM1_3: COM1.3 MAX232.13 | length 11.2
  Bottom Layer w0.254: COM1.3@48.766,63.29 cw(c48.766,61.557) 49.992,62.782 cw(c51.217,64.008) COM1.3@49.484,64.008 ; COM1.3@48.766,63.544 cw(c48.766,62.424) 49.558,63.216 cw(c50.35,64.008) COM1.3@49.23,64.008 ; COM1.3@48.766,64.008 50.035,62.739 MAX232.13@53.09,62.739 ; MAX232.13@52.575,62.387 ccw(c51.725,61.537) 51.725,62.739 ccw(c51.725,63.941) MAX232.13@52.575,63.091
NetD0_1: D0.1 L1.1 lm2576.2 | length 37.7
  Top Layer w1: lm2576.2@62.103,149.606 62.103,137.668 D0.1@66.167,133.604 ; D0.1@65.755,133.604 ccw(c64.76,133.604) 65.464,134.307 ccw(c66.167,135.011) D0.1@66.167,134.016
  Bottom Layer w1: D0.1@66.167,133.604 68.961,136.398 L1.1@81.915,136.398 ; D0.1@66.167,134.016 ccw(c66.167,135.011) 66.87,134.307 ccw(c67.574,133.604) D0.1@66.579,133.604
NetD1_1: D1.1 k0.2 | length 9.7
  Bottom Layer w0.8: D1.1@120.193,148.043 126.199,148.043 k0.2@126.238,148.082 ; D1.1@120.441,147.796 cw(c121.038,147.198) 121.038,148.043 cw(c121.038,148.888) D1.1@120.441,148.291 ; 124.696,148.043 ccw(c124.696,149.624) k0.2@125.814,148.506 ; 124.883,148.043 cw(c124.883,146.727) k0.2@125.814,147.658
NetD1_2: D1.2 k0.1 U1.3 | length 34.7
  Top Layer w0.8: U1.3@115.443,137.414 117.805,139.776 117.805,153.235 D1.2@120.193,155.623 120.571,155.623 121.031,156.083 ; U1.3@115.443,137.764 ccw(c115.443,138.609) 116.04,138.011 ccw(c116.638,137.414) U1.3@115.793,137.414 ; 119.596,155.026 cw(c120.193,154.428) D1.2@120.193,155.273 ; 119.596,155.026 ccw(c118.998,155.623) D1.2@119.843,155.623 ; D1.2@120.329,155.946 ccw(c120.578,156.536) 121.031,156.083 ; D1.2@120.441,155.376 cw(c122.148,153.668) 122.148,156.083 ; D1.2@120.543,155.611 cw(c121.031,155.595) 121.031,156.083 ; k0.1@125.814,155.659 ccw(c124.789,154.634) 124.789,156.083 ccw(c124.789,157.531) k0.1@125.814,156.507 ; k0.1@126.238,156.083 121.031,156.083
NetD2_2: D2.2 k1.1 U2.3 | length 27.4
  Top Layer w0.8: U2.3@115.443,132.334 120.193,137.084 D2.2@120.193,140.891 120.889,141.587 k1.1@126.238,141.587 ; U2.3@115.443,132.684 ccw(c115.443,133.529) 116.04,132.931 ccw(c116.638,132.334) U2.3@115.793,132.334 ; D2.2@119.875,141.209 cw(c120.786,140.298) 120.786,141.587 120.539,141.587 120.193,141.241 ccw(c120.193,142.086) 120.791,141.489 ccw(c121.388,140.891) D2.2@120.543,140.891 ; D2.2@119.946,140.644 cw(c119.348,140.046) 120.193,140.046 cw(c121.038,140.046) 120.441,140.644 cw(c122.718,138.367) 122.718,141.587 ; k1.1@125.814,141.163 ccw(c124.789,140.138) 124.789,141.587 ccw(c124.789,143.035) k1.1@125.814,142.011
NetD3_2: D3.2 k2.1 U3.3 | length 21.1
  Bottom Layer w0.8: U3.3@115.443,127.254 119.607,127.254 ; U3.3@115.69,127.007 cw(c116.288,126.409) 116.288,127.254 cw(c116.288,128.099) U3.3@115.69,127.501 ; 117.932,127.254 cw(c117.932,124.406) D3.2@119.946,126.42 ; D3.2@119.843,126.672 ccw(c119.035,126.682) 119.607,127.254 ; D3.2@120.189,127.017 cw(c120.178,127.826) 119.607,127.254 ; D3.2@120.193,126.317 cw(c120.193,125.472) 120.791,126.07 ; D3.2@120.543,126.667 ccw(c121.388,126.667) 120.791,126.07 ; k2.1@125.638,127.091 cw(c124.189,127.091) 125.214,126.066 cw(c126.238,125.042) k2.1@126.238,126.491 ; k2.1@126.238,127.091 124.115,124.968 121.893,124.968 D3.2@120.193,126.667 119.607,127.254
NetD4_2: D4.2 k3.1 U4.3 | length 27.1
  Bottom Layer w0.8: U4.3@115.196,121.927 cw(c114.598,121.329) 115.443,121.329 cw(c116.288,121.329) U4.3@115.69,121.927 ; U4.3@115.443,122.174 115.443,116.722 D4.2@120.193,111.971 120.816,112.595 k3.1@126.238,112.595 ; D4.2@119.843,111.971 ccw(c118.998,111.971) 119.596,112.569 ccw(c120.193,113.166) 120.193,112.321 ccw(c120.193,113.166) 120.791,112.569 ccw(c121.388,111.971) D4.2@120.543,111.971 ; D4.2@120.441,111.724 cw(c122.542,109.622) 122.542,112.595 ; k3.1@125.814,112.17 ccw(c124.789,111.146) 124.789,112.595 ccw(c124.789,114.043) k3.1@125.814,113.019
NetD5_2: D5.2 k4.1 U5.3 | length 32.7
  Top Layer w0.8: U5.3@115.189,80.01 117.348,82.169 117.348,94.83 D5.2@120.193,97.675 ; U5.3@115.189,80.36 ccw(c115.189,81.205) 115.786,80.607 ccw(c116.384,80.01) U5.3@115.539,80.01 ; D5.2@119.843,97.675 cw(c118.998,97.675) 119.596,97.077 cw(c120.193,96.48) D5.2@120.193,97.325
  Bottom Layer w0.8: D5.2@120.193,97.675 120.617,98.098 k4.1@126.238,98.098 ; D5.2@120.441,97.427 cw(c122.061,95.807) 122.061,98.098 ; k4.1@125.814,97.674 ccw(c124.789,96.65) 124.789,98.098 ccw(c124.789,99.547) k4.1@125.814,98.523
NetD6_2: D6.2 k5.1 U6.3 | length 23.9
  Top Layer w0.8: U6.3@115.189,74.93 120.193,79.934 D6.2@120.193,83.378 ; U6.3@115.189,75.28 ccw(c115.189,76.125) 115.786,75.527 ccw(c116.384,74.93) U6.3@115.539,74.93 ; D6.2@119.946,83.131 cw(c119.348,82.533) 120.193,82.533 cw(c121.038,82.533) D6.2@120.441,83.131
  Bottom Layer w0.8: D6.2@120.193,83.378 121.651,84.836 125.004,84.836 k5.1@126.238,83.602 ; D6.2@120.193,83.728 ccw(c120.193,84.573) 120.791,83.976 ccw(c121.388,83.378) D6.2@120.543,83.378 ; k5.1@125.638,83.602 ccw(c124.189,83.602) 125.214,84.627 ccw(c126.238,85.651) k5.1@126.238,84.202
NetD7_2: D7.2 k6.1 U7.3 | length 21.6
  Bottom Layer w0.8: U7.3@115.189,69.85 119.425,69.85 ; U7.3@115.436,69.603 cw(c116.034,69.005) 116.034,69.85 cw(c116.034,70.695) U7.3@115.436,70.097 ; 117.494,69.85 cw(c117.494,66.382) D7.2@119.946,68.834 ; D7.2@119.843,69.082 ccw(c118.998,69.082) 119.596,69.679 ccw(c120.193,70.277) D7.2@120.193,69.432 ; D7.2@120.441,68.834 cw(c121.038,68.237) 121.038,69.082 cw(c121.038,69.927) D7.2@120.441,69.329 ; D7.2@120.512,69.4 ccw(c119.425,68.313) 119.425,69.85 ; 124.731,69.082 ccw(c124.731,70.614) k6.1@125.814,69.53 ; 124.848,69.082 cw(c124.848,67.716) k6.1@125.814,68.682 ; k6.1@126.238,69.106 126.214,69.082 D7.2@120.193,69.082 119.425,69.85
NetD8_2: D8.2 k7.1 U8.3 | length 25.7
  Bottom Layer w0.8: U8.3@114.942,64.396 cw(c114.344,63.798) 115.189,63.798 cw(c116.034,63.798) U8.3@115.436,64.396 ; U8.3@115.189,64.643 115.189,59.79 D8.2@120.193,54.785 121.92,56.512 124.336,56.512 k7.1@126.238,54.61 ; D8.2@119.843,54.785 ccw(c118.998,54.785) 119.596,55.383 ccw(c120.193,55.98) 120.193,55.135 ccw(c120.193,55.98) 120.791,55.383 ccw(c121.388,54.785) D8.2@120.543,54.785 ; k7.1@125.638,54.61 ccw(c124.189,54.61) 125.214,55.634 ccw(c126.238,56.659) k7.1@126.238,55.21
NetIN0_1: IN0.1 R3.2 | length 26.1
  Top Layer w0.254: IN0.1@58.801,125.996 cw(c58.801,124.492) 59.865,125.555 cw(c60.928,126.619) IN0.1@59.424,126.619 ; IN0.1@58.801,126.25 cw(c58.801,125.359) 59.431,125.989 cw(c60.061,126.619) IN0.1@59.17,126.619 ; IN0.1@58.801,126.619 66.548,118.872 66.548,112.903 R3.2@67.691,111.76 ; R3.2@67.068,111.76 ccw(c65.564,111.76) 66.627,112.824 ccw(c67.691,113.887) R3.2@67.691,112.383 ; R3.2@67.322,111.76 ccw(c66.431,111.76) 67.061,112.39 ccw(c67.691,113.02) R3.2@67.691,112.129
NetIN1_1: IN1.1 R3.3 | length 23.5
  Top Layer w0.254: IN1.1@58.801,120.916 cw(c58.801,119.412) 59.865,120.475 cw(c60.928,121.539) IN1.1@59.424,121.539 ; IN1.1@58.801,121.17 cw(c58.801,120.279) 59.431,120.909 cw(c60.061,121.539) IN1.1@59.17,121.539 ; IN1.1@58.801,121.539 62.941,117.399 62.941,113.97 R3.3@67.691,109.22 ; R3.3@67.068,109.22 ccw(c65.564,109.22) 66.627,110.284 ccw(c67.691,111.347) R3.3@67.691,109.843 ; R3.3@67.322,109.22 ccw(c66.431,109.22) 67.061,109.85 ccw(c67.691,110.48) R3.3@67.691,109.589
NetIN2_1: IN2.1 R3.4 | length 18
  Top Layer w0.254: IN2.1@58.588,115.873 cw(c58.478,115.57) 58.801,115.57 ; IN2.1@58.801,116.459 58.801,115.57 ; IN2.1@59.014,115.873 ccw(c59.124,115.57) 58.801,115.57 ; R3.4@67.068,106.68 ccw(c65.564,106.68) 66.627,107.744 ccw(c67.691,108.807) R3.4@67.691,107.303 ; R3.4@67.322,106.68 ccw(c66.431,106.68) 67.061,107.31 ccw(c67.691,107.94) R3.4@67.691,107.049 ; R3.4@67.691,106.68 58.801,115.57
NetIN3_1: IN3.1 R3.5 | length 19.4
  Bottom Layer w0.254: IN3.1@58.801,110.756 cw(c58.801,109.252) 59.865,110.315 cw(c60.928,111.379) IN3.1@59.424,111.379 ; IN3.1@58.801,111.01 cw(c58.801,110.119) 59.431,110.749 cw(c60.061,111.379) IN3.1@59.17,111.379 ; IN3.1@58.801,111.379 62.408,107.772 64.059,107.772 R3.5@67.691,104.14 ; R3.5@67.068,104.14 ccw(c65.564,104.14) 66.627,105.204 ccw(c67.691,106.267) R3.5@67.691,104.763 ; R3.5@67.322,104.14 ccw(c66.431,104.14) 67.061,104.77 ccw(c67.691,105.4) R3.5@67.691,104.509
NetIN4_1: IN4.1 R3.6 | length 18.4
  Bottom Layer w0.254: IN4.1@58.801,106.299 62.992,106.299 R3.6@67.691,101.6 ; IN4.1@59.062,106.038 cw(c59.692,105.408) 59.692,106.299 cw(c59.692,107.19) IN4.1@59.062,106.56 ; IN4.1@59.242,105.858 cw(c60.305,104.795) 60.305,106.299 cw(c60.305,107.803) IN4.1@59.242,106.74 ; R3.6@67.068,101.6 ccw(c65.564,101.6) 66.627,102.664 ccw(c67.691,103.727) R3.6@67.691,102.223 ; R3.6@67.322,101.6 ccw(c66.431,101.6) 67.061,102.23 ccw(c67.691,102.86) R3.6@67.691,101.969
NetIN5_1: IN5.1 R3.7 | length 17.3
  Bottom Layer w0.254: IN5.1@58.801,100.596 cw(c58.801,99.092) 59.865,100.155 cw(c60.928,101.219) IN5.1@59.424,101.219 ; IN5.1@58.801,100.85 cw(c58.801,99.959) 59.431,100.589 cw(c60.061,101.219) IN5.1@59.17,101.219 ; IN5.1@58.801,101.219 60.96,99.06 R3.7@67.691,99.06 ; R3.7@67.25,98.619 ccw(c66.187,97.556) 66.187,99.06 ccw(c66.187,100.564) R3.7@67.25,99.501 ; R3.7@67.43,98.799 ccw(c66.8,98.169) 66.8,99.06 ccw(c66.8,99.951) R3.7@67.43,99.321
NetIN6_1: IN6.1 R3.8 | length 16.6
  Bottom Layer w0.254: IN6.1@58.801,96.139 62.865,96.139 63.246,96.52 R3.8@67.691,96.52 ; IN6.1@59.062,95.878 cw(c59.692,95.248) 59.692,96.139 cw(c59.692,97.03) IN6.1@59.062,96.4 ; IN6.1@59.242,95.698 cw(c60.305,94.635) 60.305,96.139 cw(c60.305,97.643) IN6.1@59.242,96.58 ; R3.8@67.25,96.079 ccw(c66.187,95.016) 66.187,96.52 ccw(c66.187,98.024) R3.8@67.25,96.961 ; R3.8@67.43,96.259 ccw(c66.8,95.629) 66.8,96.52 ccw(c66.8,97.411) R3.8@67.43,96.781
NetIN7_1: IN7.1 R3.9 | length 17.6
  Bottom Layer w0.254: IN7.1@58.801,91.059 61.722,93.98 R3.9@67.691,93.98 ; IN7.1@58.801,91.428 ccw(c58.801,92.319) 59.431,91.689 ccw(c60.061,91.059) IN7.1@59.17,91.059 ; IN7.1@58.801,91.682 ccw(c58.801,93.186) 59.865,92.123 ccw(c60.928,91.059) IN7.1@59.424,91.059 ; R3.9@67.25,93.539 ccw(c66.187,92.476) 66.187,93.98 ccw(c66.187,95.484) R3.9@67.25,94.421 ; R3.9@67.43,93.719 ccw(c66.8,93.089) 66.8,93.98 ccw(c66.8,94.871) R3.9@67.43,94.241
Netk0_3: k0.3 OUT0.1 | length 12.2
  Bottom Layer w2.5: k0.3@150.114,148.082 160.02,148.082 OUT0.1@161.671,149.733
Netk0_4: k0.4 OUT0.2 | length 15.6
  Bottom Layer w2.5: k0.4@146.558,155.956 160.528,155.956 OUT0.2@161.671,154.813
Netk1_3: k1.3 OUT1.1 | length 12.3
  Bottom Layer w2.5: k1.3@150.114,133.586 159.984,133.586 OUT1.1@161.671,135.273
Netk1_4: k1.4 OUT1.2 | length 15.6
  Bottom Layer w2.5: k1.4@146.558,141.46 160.564,141.46 OUT1.2@161.671,140.353
Netk2_3: k2.3 OUT2.1 | length 12.3
  Bottom Layer w2.5: k2.3@150.114,119.09 159.947,119.09 OUT2.1@161.671,120.813